# Altium PCB MainBoard.PcbDoc
Units mil, origin at the board's own origin, x right, y up, seen from the top; angles counter-clockwise.
Board outline 985 x 985 mil, 2 copper layers (Top1, Bottom4), stack 42.17 mil thick; 32 components, 51 nets, 209 pads, 95 vias.
Unrouted connection lines stored in the file: 2.
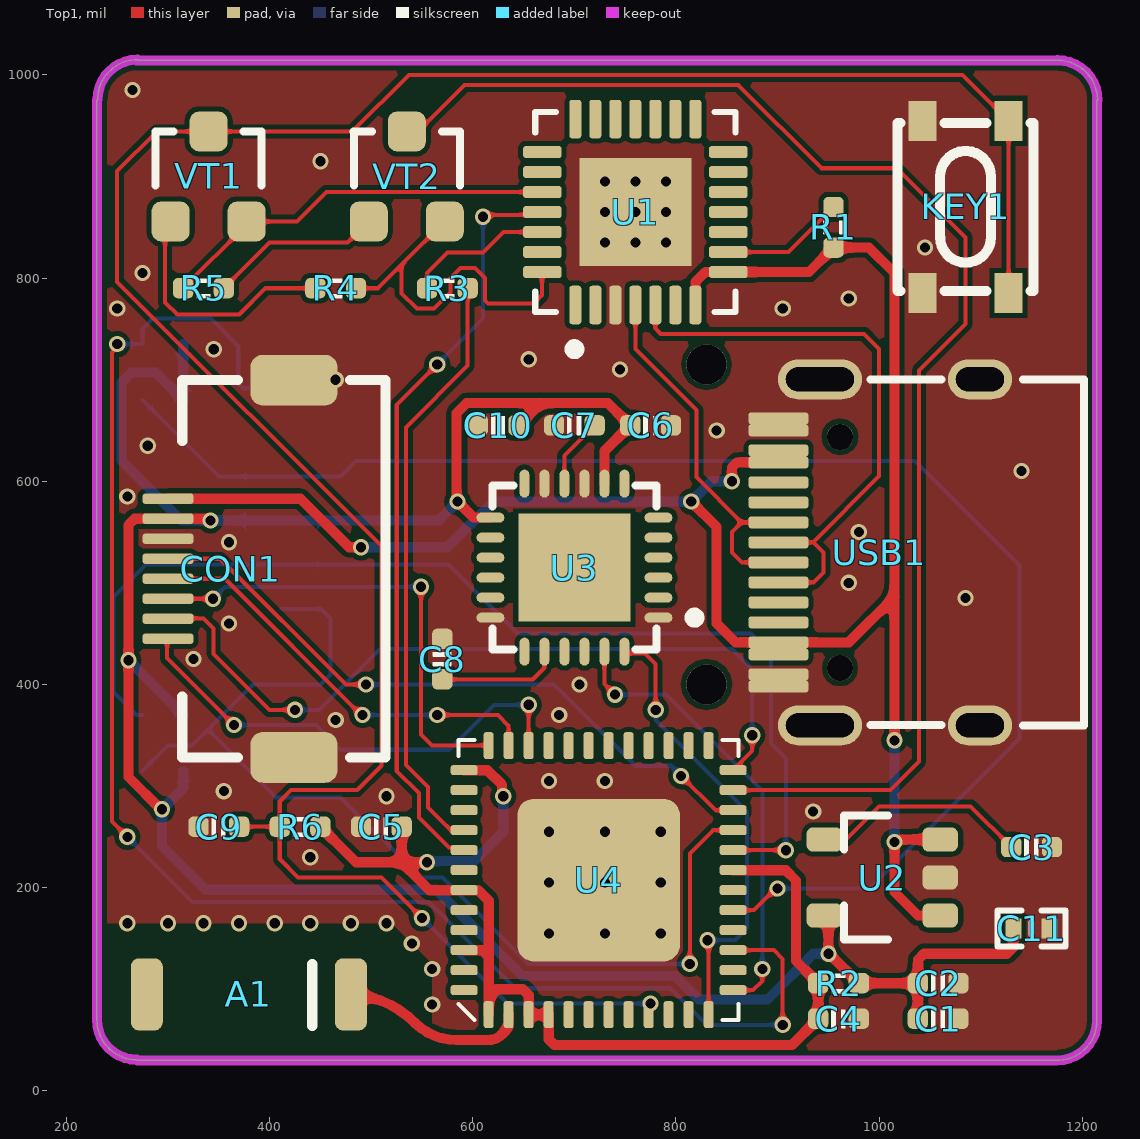
[diagram p0: Top1 view]
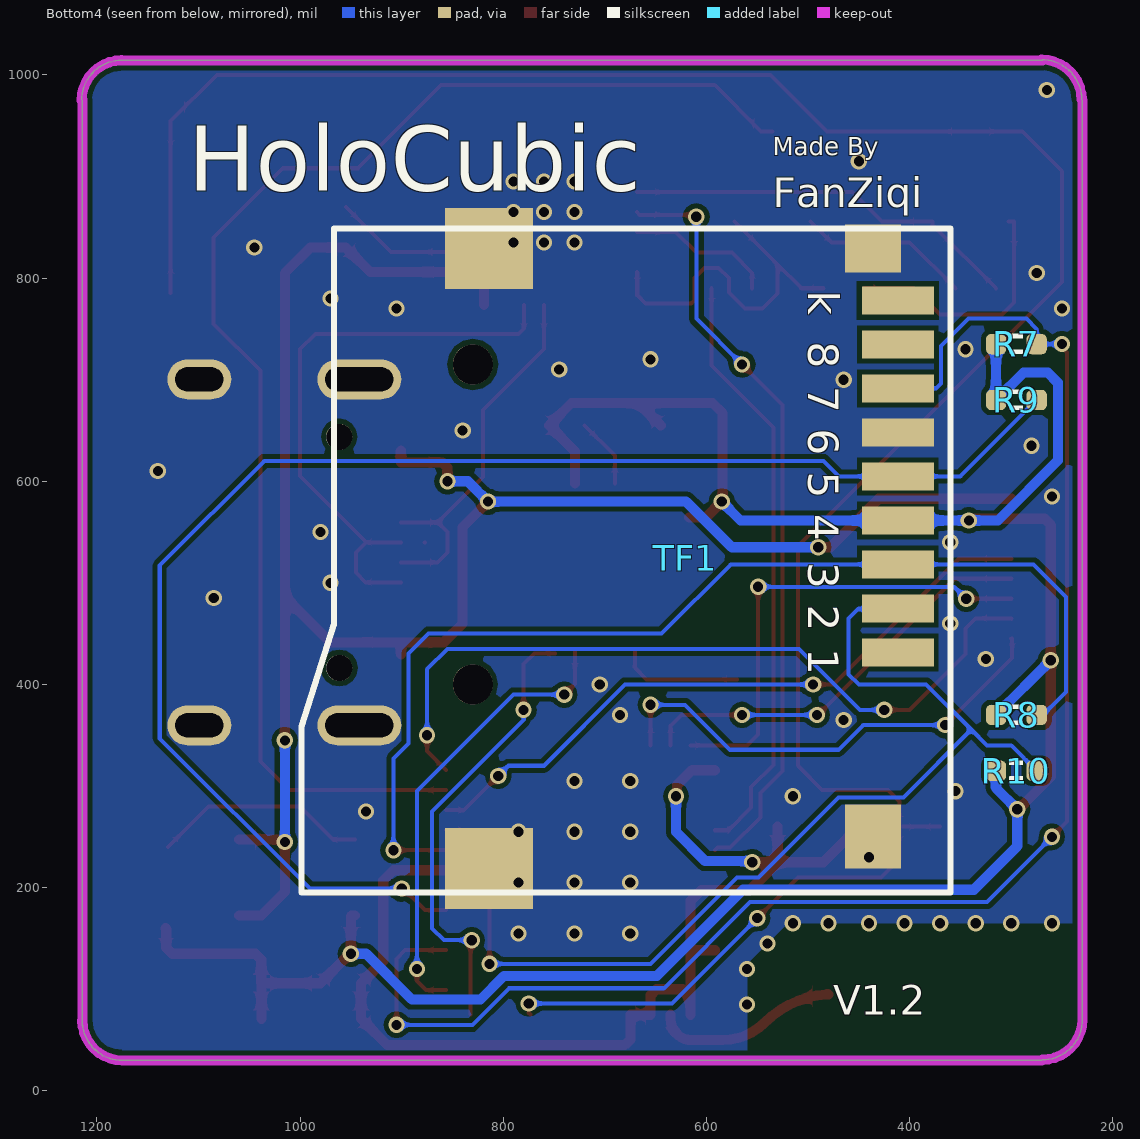
[diagram p1: Bottom4 view, seen from below]
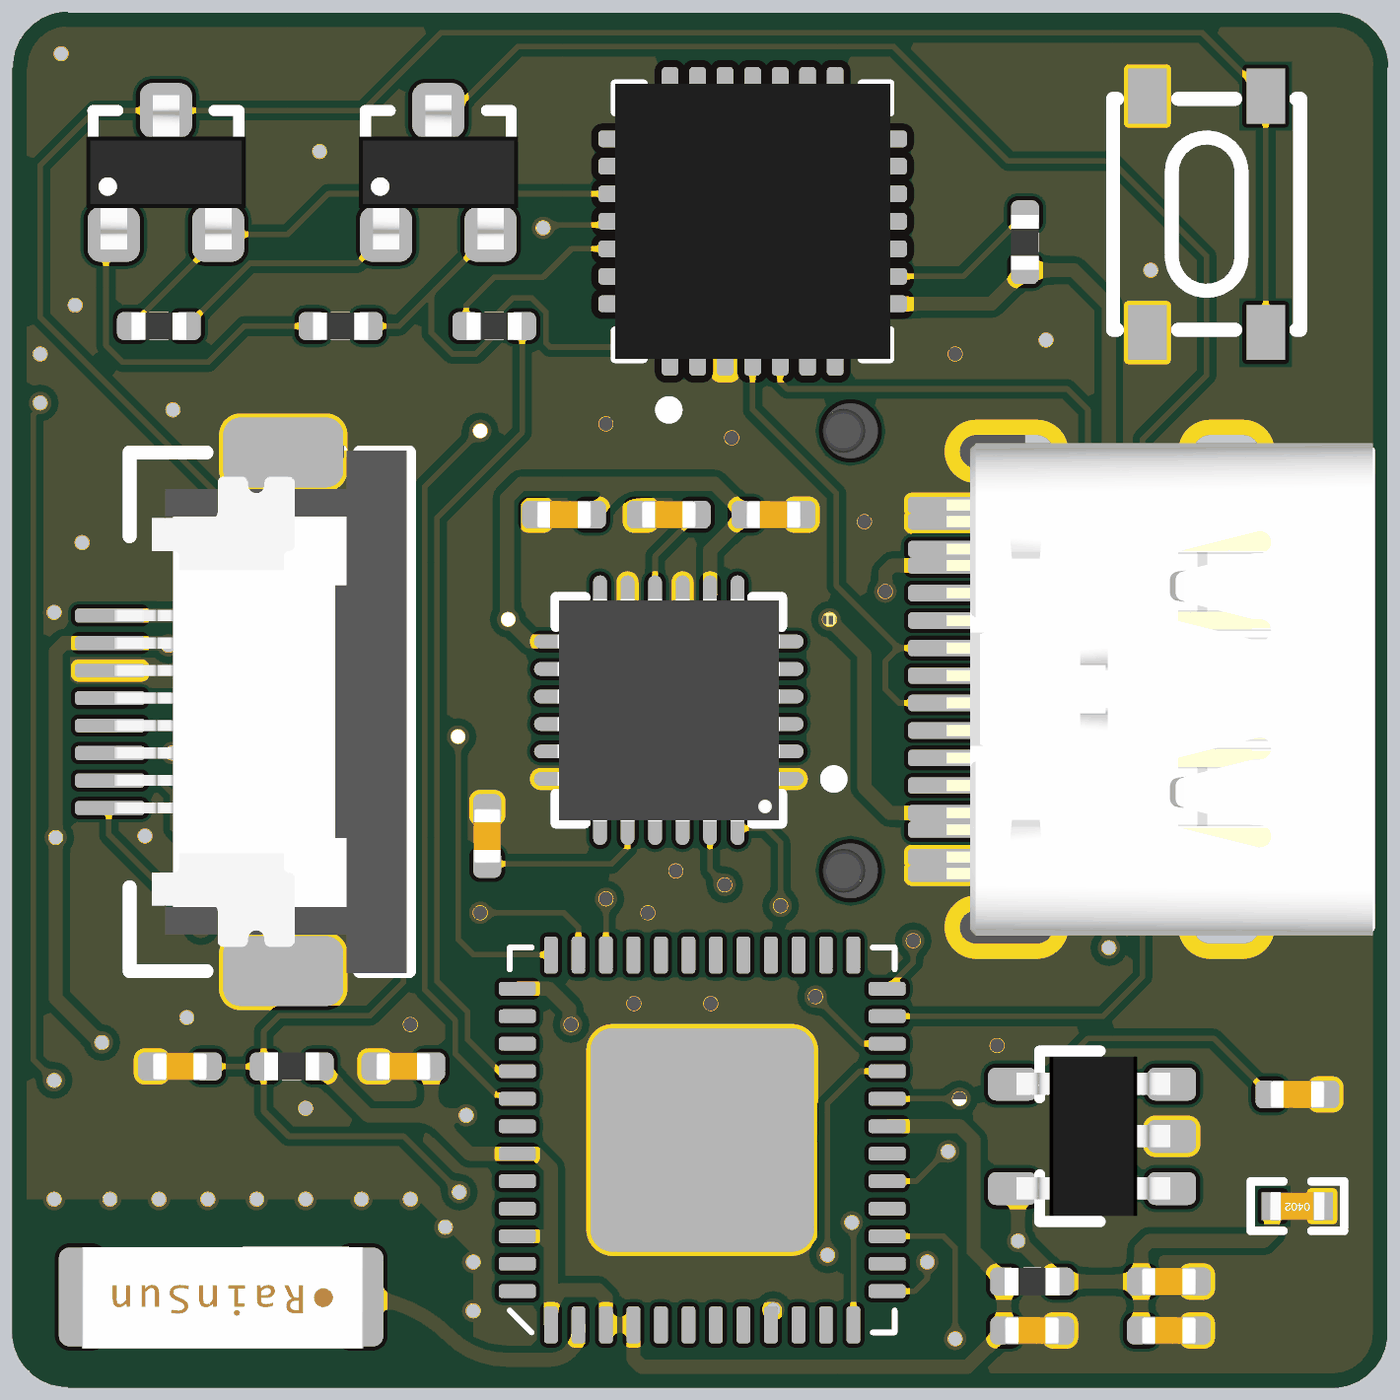
[diagram p2: 3D render of the assembled board from above, using the file's embedded part models]
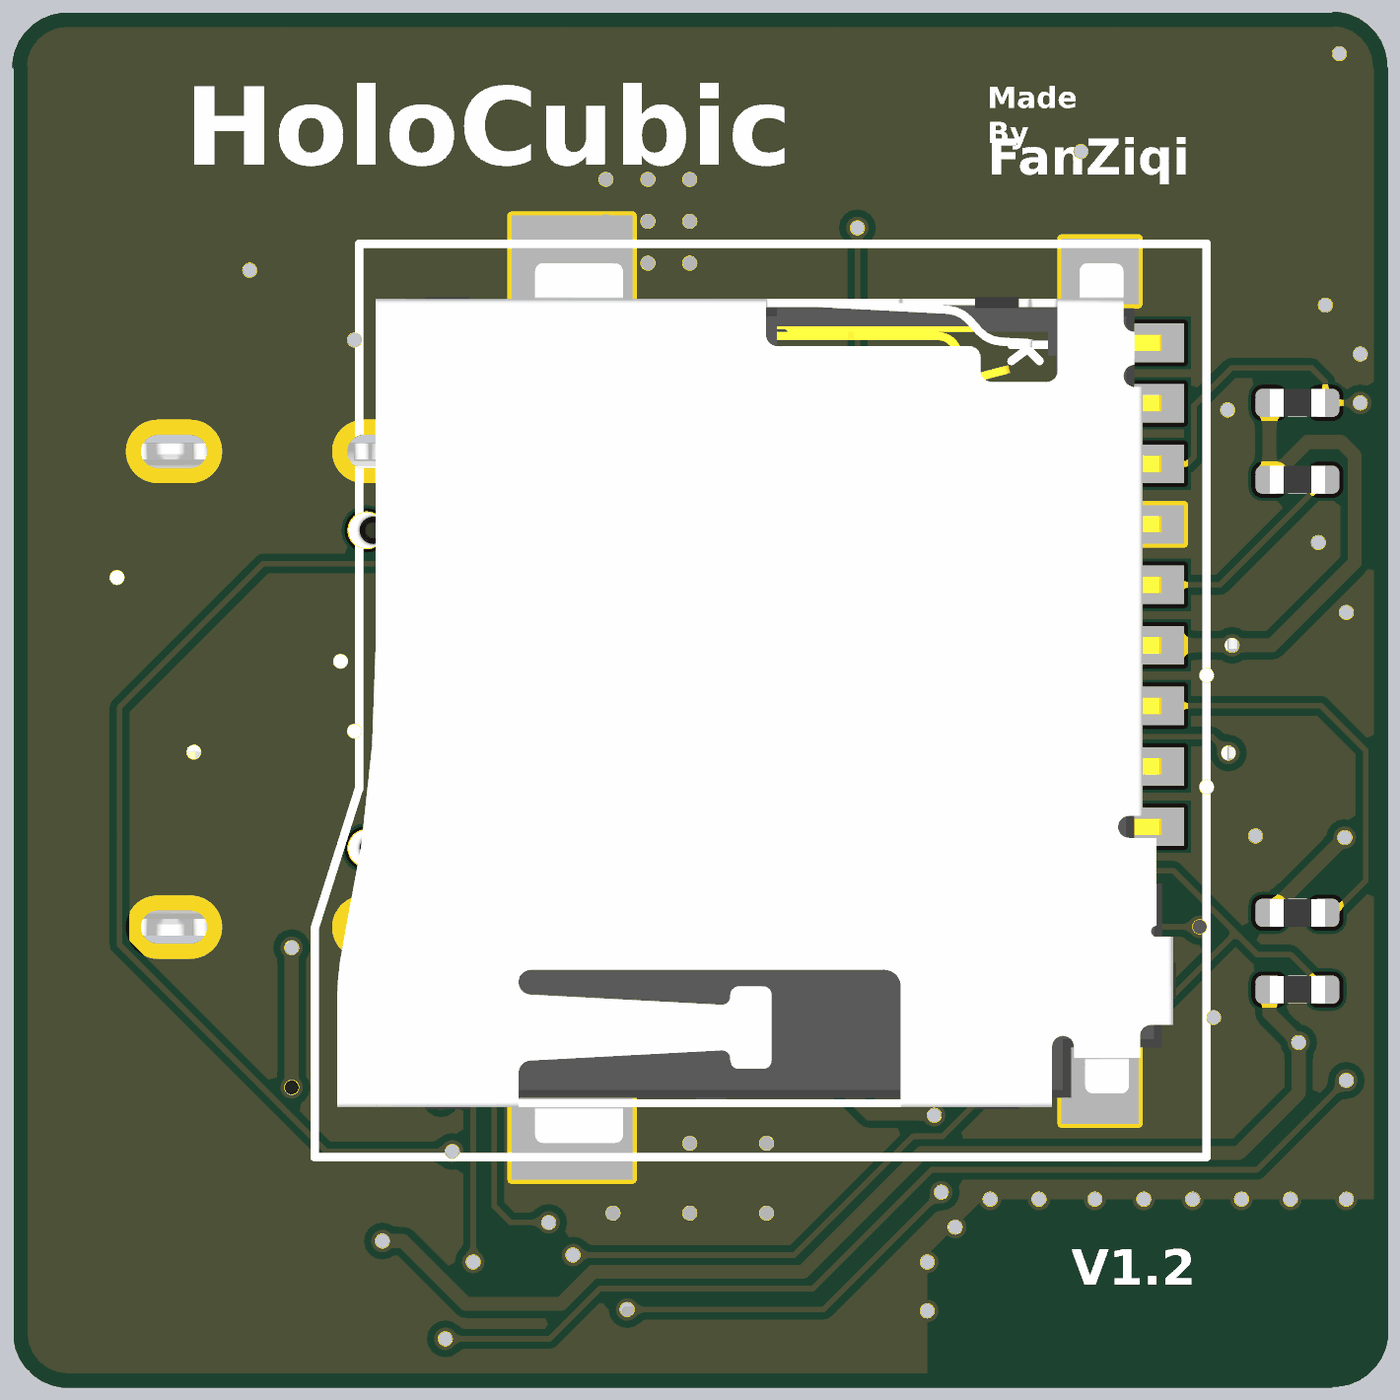
[diagram p3: 3D render of the assembled board from below, using the file's embedded part models]

## Layer stack, top to bottom
Top Solder: solder mask 0.4, Solder Resist, Dk 3.5
Top1: signal copper 1.4
Dielectric 2: core 39.37, PP-006, Dk 4.2
Bottom4: signal copper 1.4
Bottom Solder: solder mask 0.4, Solder Resist, Dk 3.5

## Board outline
230,70 230,975 230.63,975.63 cw(c270,975.63) 270,1015 269.25,1014.25 1175.75,1014.25 1175.63,1014.37 cw(c1175.63,975) 1215,975 1214.25,975.75 1214.25,70 1214.37,69.37 cw(c1175,69.37) 1175,30 270,30 269.37,30.63 cw(c269.37,70)

## Design rules (kind name [scope] priority, off if disabled: settings)
Clearance [All] p1: gap=5 ignorepadtopadclearanceinfootprint=FALSE except(1: Arc-Text Track-Text SMDPad-Text THPad-Text Via-Text Fill-Text Poly-Text Region-Text Text-Text)
ComponentClearance [All] p1: gap=0 collisioncheckmode=3 verticalgap=0 showdistances=FALSE
DiffPairsRouting [InDifferentialPairClass('USB')] p1: maxlimit=7 minlimit=5 mostfreqgap=6 toplayer_minwidth=4 toplayer_maxwidth=9 toplayer_prefwidth=4 bottomlayer_minwidth=4 bottomlayer_maxwidth=9 bottomlayer_prefwidth=4 maxuncoupledlength=500
FanoutControl Fanout_BGA [All] p1: bgadir=Out bgaviamode=Centered fanoutstyle=Auto fanoutdirection=Alternating viagrid=1 // Fanout_BGA (Default Rule)
HoleSize [All] p1: absolutevalues=TRUE maxlimit=235 minlimit=8 maxpercent=80.000 minpercent=20.000
MatchedLengths DiffPair_MatchedLengths [InDifferentialPair ('USB')] p1: tolerance=1000 checknetsindiffpair=FALSE checkdiffpairvsdiffpair=TRUE checkxsignals=TRUE checkothers=TRUE
MinimumSolderMaskSliver [All] p1 off: minsoldermaskwidth=2
PlaneClearance [All] p1: clearance=8
PlaneConnect [All] p1: planeconnectstyle=Direct reliefexpansion=20 reliefentries=4 reliefconductorwidth=10 reliefairgap=10
PolygonConnect [All] p1: connectstyle=Direct reliefconductorwidth=10 reliefentries=4 polygonreliefangle="90 Angle" airgapwidth=10
RoutingVias [All] p1: holewidth=8 width=16 viastyle="Through Hole" minholewidth=6 minwidth=12 maxholewidth=28 maxwidth=50
SilkToBoardRegionClearance [All] p1 off:
SilkToSilkClearance [All] p1: silktosilkclearance=0
SilkToSolderMaskClearance [IsPad] p1: minsilkscreentomaskgap=0 clearancetoexposedcopper=TRUE
SolderMaskExpansion [All] p1: expansion=3 istentingtop=FALSE
Width 5V [InNet('VDD_5V')] p1: maxlimit=10 minlimit=10 preferedwidth=10
Width 3V3A [InNet('3V3A')] p2: maxlimit=10 minlimit=10 preferedwidth=10
Width 3V3 [InNet('3V3')] p3: maxlimit=10 minlimit=10 preferedwidth=10
Width [InNetClass('BuXian')] p4: maxlimit=4 minlimit=4 preferedwidth=4
Width GND [InNet('GND')] p5: maxlimit=0.04 minlimit=0.04 preferedwidth=0.04
20 further rules are at their usual default settings.

## Classes and differential pairs
differential pair class 90OM: USB
net class GND: GND
differential pair USB: +USB-PWR-DP -USB-PWR-DM

## Components (designator, comment, footprint, x,y, rotation, side; value= is the part's Value field where it differs from the comment)
A1 "RAINSUN" ANT-Rainsun-AN5120 380,95 r180 top
C1 "0.1uF" CAP_0402 1058,71 r180 top value=0.1u
C2 "10uF" CAP_0402 1058,106 r180 top value=0.1u
C3 "10nF" CAP_0402 1150,240 r180 top value=0.1u
C4 "10uF" CAP_0402 960,71 r180 top value=0.1u
C5 "0.1uF" CAP_0402 510,260 r0 top value=0.1u
C6 "0.01uF" CAP_0402 775,655 r0 top value=0.1u
C7 "0.1uF" CAP_0402 700,655 r180 top value=0.1u
C8 "2.2nF" CAP_0402 570,425 r270 top value=0.1u
C9 "0.1uF" CAP_0402 350,260 r180 top value=0.1u
C10 "0.1uF" CAP_0402 625,655 r0 top value=0.1u
C11 "0.1uf" C0402_L 1150,160 r180 top
CON1 "FFC_0.5_8" FFC_0.5_8 389,513.9 r90 top
KEY1 "4x4x1.5" SW-SMD_4P-L4.2-W3.3-P2.15-LS5.1 1085,870 r270 top
R1 "10K" RES_0402 955,850 r90 top value=22R
R2 "0R" RES_0402 960,106 r180 top value=22R
R3 "200R" RES_0402 575,790 r180 top value=22R
R4 "12K" RES_0402 465,790 r180 top value=22R
R5 "12K" RES_0402 335,790 r0 top value=22R
R6 "10K" RES_0402 430,260 r180 top value=22R
R7 "10K" RES_0402 295,735 r180 bottom value=22R
R8 "10K" RES_0402 295,370 r180 bottom value=22R
R9 "10K" RES_0402 295,680 r180 bottom value=22R
R10 "10K" RES_0402 295,315 r180 bottom value=22R
TF1 "TF_Card" "Micro SD" 830,557.52 r270 bottom
U1 "CP2102" QFN-28 760,865 r90 top value=Value
U2 "LP2992 3V3" SOT23-5 1000.95,210 r180 top
U3 "MPU6050" QFN-24 700,515 r180 top
U4 "ESP32_SIP" QFN-48_7X7 723.9,207.39 r90 top
USB1 "Type-C" Type-C-TOP 1000,530 r0 top
VT1 "S8050" SMT_TRIODE_NPN 340,900 r0 top
VT2 "S8050" SMT_TRIODE_NPN 535,900 r0 top

## Footprints (in the part's own frame and the unit in brackets; to place one, negate y for a bottom-side part, rotate by r counter-clockwise, add the part's x,y. Pads: shape width x height; smd on the part's side, far side on the other; paste and mask are expansions set on the pad)
ANT-Rainsun-AN5120 [mm] "选择焊盘"
  rrect50% 0.8x1.8 smd: 1(-2.54,0) ""(2.563,0)
  silkscreen extent -1.57,-0.76 -1.57,0.79, body extent -2.57,-0.91 2.54,0.94, height 1.32
C0402_L [mm] "无极性贴片电容"
  rect 0.4x0.5 smd: 1(-0.45,0) 2(0.45,0)
  silkscreen extent -0.85,-0.45 0.85,0.45, body extent -0.5,-0.26 0.5,0.26, height 0.54
CAP_0402 [mil]
  rrect50% 20x20 smd: 1(-20,0) 2(20,0)
  silkscreen extent -7,-9 7,9, body extent -20,-10 20,10, height 20
FFC_0.5_8 [mil]
  rrect50% 50x86 smd: 0(-185.63,-35) 0(185.63,-35)
  rrect50% 10x50 smd: 1(-68.9,89) 2(-49.21,89) 3(-29.53,89) 4(-9.84,89) 5(9.84,89) 6(29.53,89) 7(49.21,89) 8(68.9,89)
  silkscreen extent -186,-125 186,75, body extent -187,-124 187,87, height 82
"Micro SD" [mm] "淘宝ID:黄晶宝石"
  round 1 hole 1 unplated: 0(-4,0) 0(4,0)
  rect 0.7x1.8 smd: 1(3.2,10.627) 2(2.1,10.627) 3(1,10.627) 4(-0.1,10.627) 5(-1.2,10.627) 6(-2.3,10.627) 7(-3.4,10.627) 8(-4.5,10.627) 9(-5.6,10.627)
  rect 2.032x2.2 smd: 10(-6.9,0.4) 10(8.6,0.4)
  rect 1.2x1.4 smd: 10(-6.9,10)
  rect 1.6x1.4 smd: 10(7.8,10)
  silkscreen extent -7.4,-4.28 9.2,11.94, body extent -7.05,-3.87 8.95,11.38, height 2
QFN-24 [mm] "QFN, 24-Leads, Body 4.1x4.1mm (max), Pitch 0.50mm, IPC Low Density"
  oval 0.7x0.25 smd: 1(-2.1,1.25) 2(-2.1,0.75) 3(-2.1,0.25) 4(-2.1,-0.25) 5(-2.1,-0.75) 6(-2.1,-1.25) 13(2.1,-1.25) 14(2.1,-0.75) 15(2.1,-0.25) 16(2.1,0.25) 17(2.1,0.75) 18(2.1,1.25)
  oval 0.25x0.7 smd: 7(-1.25,-2.1) 8(-0.75,-2.1) 9(-0.25,-2.1) 10(0.25,-2.1) 11(0.75,-2.1) 12(1.25,-2.1) 19(1.25,2.1) 20(0.75,2.1) 21(0.25,2.1) 22(-0.25,2.1) 23(-0.75,2.1) 24(-1.25,2.1)
  rect 2.8x2.7 smd: ""(0,0)
  silkscreen extent -3.13,-2.05 2.05,2.05, body extent -2.02,-2.02 2.02,2.02, height 0.95
QFN-28 [mil]
  rrect50% 38x12 smd mask+5: 1(-91.5,59.05) 2(-91.5,39.37) 3(-91.5,19.68) 4(-91.5,0) 5(-91.5,-19.69) 6(-91.5,-39.37) 7(-91.5,-59.06) 15(91.5,-59.06) 16(91.5,-39.37) 17(91.5,-19.69) 18(91.5,0) 19(91.5,19.68) 20(91.5,39.37) 21(91.5,59.05)
  rrect50% 12x38 smd mask+5: 8(-59.06,-91.5) 9(-39.37,-91.5) 10(-19.69,-91.5) 11(0,-91.5) 12(19.68,-91.5) 13(39.37,-91.5) 14(59.05,-91.5) 22(59.05,91.5) 23(39.37,91.5) 24(19.68,91.5) 25(0,91.5) 26(-19.69,91.5) 27(-39.37,91.5) 28(-59.06,91.5)
  rect 106.3x110.24 smd: 29(0,0)
  silkscreen extent -140,-99 98,98, body extent -98,-98 98,98, height 35
QFN-48_7X7 [mm]
  rrect20% 4.064x4.064 smd: 0(0,0)
  rrect50% 0.675x0.25 smd: 1(-3.363,2.75) 2(-3.363,2.25) 3(-3.363,1.75) 4(-3.363,1.25) 5(-3.363,0.75) 6(-3.363,0.25) 7(-3.363,-0.25) 8(-3.363,-0.75) 9(-3.363,-1.25) 10(-3.363,-1.75) 11(-3.363,-2.25) 12(-3.363,-2.75) 25(3.362,-2.75) 26(3.362,-2.25) 27(3.362,-1.75) 28(3.362,-1.25) 29(3.362,-0.75) 30(3.362,-0.25) 31(3.362,0.25) 32(3.362,0.75) 33(3.362,1.25) 34(3.362,1.75) 35(3.362,2.25) 36(3.362,2.75)
  rrect50% 0.25x0.675 smd: 13(-2.75,-3.363) 14(-2.25,-3.363) 15(-1.75,-3.363) 16(-1.25,-3.363) 17(-0.75,-3.363) 18(-0.25,-3.363) 19(0.25,-3.363) 20(0.75,-3.363) 21(1.25,-3.363) 22(1.75,-3.363) 23(2.25,-3.363) 24(2.75,-3.363) 37(2.75,3.362) 38(2.25,3.362) 39(1.75,3.362) 40(1.25,3.362) 41(0.75,3.362) 42(0.25,3.362) 43(-0.25,3.362) 44(-0.75,3.362) 45(-1.25,3.362) 46(-1.75,3.362) 47(-2.25,3.362) 48(-2.75,3.362)
  silkscreen extent -3.5,-3.5 3.5,3.5, body extent -3.5,-3.5 3.5,3.5, height 1
RES_0402 [mil]
  rrect50% 20x20 smd: 1(-20,0) 2(20,0)
  silkscreen extent -7,-10 7,10, body extent -20,-10 20,10, height 14
SMT_TRIODE_NPN [mm] "Surface mount NPN transistor, package SOT-23"
  rrect50% 0.95x1 smd: 1(-0.95,-1.125) 2(0.95,-1.125) 3(0,1.125)
  silkscreen extent -1.33,-0.23 1.32,1.12, body extent -1.45,-1.4 1.45,1.4, height 1.3
SOT23-5 [mm] "SOT23, 3-Leads, Body 3.1x3.0mm (max), Pitch 0.95mm, IPC Medium Density"
  rrect50% 0.889x0.6 smd: 1(-1.5,0.95) 2(-1.5,0) 3(-1.5,-0.95) 4(1.396,-0.95) 5(1.396,0.95)
  silkscreen extent -0.2,-1.55 0.9,1.55, body extent -1.48,-1.45 1.32,1.45, height 1.2
SW-SMD_4P-L4.2-W3.3-P2.15-LS5.1 [mm]
  rect 1x0.7 smd: 1(-2.15,1.075) 2(2.15,1.075) 3(-2.15,-1.075) 4(2.15,-1.075)
  silkscreen extent -2.1,-1.7 2.1,1.7
Type-C-TOP [mm]
  round 0.65 hole 0.65: 0(-0.98,-2.89) 0(-0.98,2.89)
  oval 1.6x1 hole 0.6 slot 1.2 at 0 deg: 1(2.52,4.325) 2(2.52,-4.325)
  oval 2.1x1 hole 0.6 slot 1.7 at 0 deg: 3(-1.48,-4.325) 4(-1.48,4.325)
  rrect50% 1.5x0.3 smd: A1(-2.52,-3.35) A4(-2.52,-2.55) A5(-2.52,-1.25) A6(-2.52,-0.25) A7(-2.52,0.25) A8(-2.52,1.25) A9(-2.52,2.55) A12(-2.52,3.35) B1(-2.52,3.05) B4(-2.52,2.25) B5(-2.52,1.75) B6(-2.52,0.75) B7(-2.52,-0.75) B8(-2.52,-1.75) B9(-2.52,-2.25) B12(-2.52,-3.05)
  silkscreen extent -0.22,-4.32 5.12,4.32, body extent -2.57,-4.48 5.18,4.48, height 3.26

## Part data
A1: library part ANT-Rainsun-AP5120
C1 C2 C3 C4 C5 C6 C7 C8 C9 C10: library part 电容-0402, "Capacitor"
C11: library part C, "贴片电容", BOM名称=无极性贴片电容, 封装库来自淘宝卖家ID：黄晶宝石=其他店铺购入均为盗版假冒封装库，请立即申请退款, 联系卖家，免费查找封装=唯一出售店铺网址https://shop463601444.taobao.com
CON1: "FFC", System=Connector
KEY1: library part "TSW SMD-4x4", "贴片4x4轻触开关", BOM名称=贴片4x4轻触开关, 联系卖家，免费查找封装=唯一出售店铺网址https://shop463601444.taobao.com
R1 R2 R3 R4 R5 R6 R7 R8 R9 R10: library part 电阻-0402, "Resistor"
TF1: "TF卡座", BOM名称=TF卡座, 联系卖家，免费技术支持=唯一出售店铺网址https://shop463601444.taobao.com
U1: "USB转TTL", MFG #1="SILICON LABS", PART DESC="SINGLE-CHIP USB TO UART BRIDGE, QFN28, RoHS.", PART NUMBER=CP2102, RefDes=RefDes, Type=DEV
U2: library part LP2992, "LDO"
U3: "六轴传感器"
U4: library part ESP32-PICO
USB1: library part USB-Type-C-TOP
VT1 VT2: library part SMT_TRIODE_NPN, "Surface mount NPN transistor, package SOT-23"

## Via types
v1: diameter 16, hole 10, Top1 to Bottom4, tented both sides, 95 vias

## Nets (pads, with @x,y where several pads share a name; then routed paths per layer and width w, separated by ;. In a path a pad name is that pad's centre, name@x,y a point inside that pad or via, vN(x,y) a via of type N, cw(c..) or ccw(c..) an arc to the next point about the centre after c; other vN are vias at no path point)
3V3: C1.2 C2.2 C6.1 C10.2 C11.2 CON1.7 R2.1 R7.1 R8.1 R9.1 R10.1 TF1.4 U2.5 U3.8 U3.13 | length 2571.5
  Top1 w10: v1(294.13,277.12) 292.88,277.12 261.13,308.87 v1(261.13,423.87) 261.13,557.12 267.12,563.11 CON1.7 340.12,563.11 v1(341.77,561.46) ; v1@584.13,580 584.13,667.12 594.13,677.12 667.12,677.12 ; v1(585,580) 600.79,564.21 U3.13 ; C10.2 667.12,677.12 ; U3.8 729.53,629.53 C6.1 732.88,677.12 667.12,677.12 ; U2.5 949.13,172.6 950,171.73 v1(950,135) 951,135 R2.1 C2.2 ; C1.2 C2.2 ; C11.2 1131.68,159.4 1131.68,140.86 1125.82,135 1044,135 1038.14,129.14 1038.14,106.14 C2.2
  Bottom4 w10: v1(261.13,423.87) R8.1 ; R10.1 315,297.99 v1(294.13,277.12) 294.13,240.87 337,198 563.97,198 648.97,113 799.41,113 822.41,90 890,90 935,135 v1(950,135) ; R7.1 R9.1 287.88,707.12 264.13,707.12 254.13,697.12 254.13,620.46 313.13,561.46 v1(341.77,561.46) TF1.4 566.46,561.46 v1(585,580)
3V3A: C4.2 C5.2 R2.2 R6.1 U4.1 U4.3 U4.4 U4.19 U4.37 U4.43 U4.46 | length 1169.8
  Top1 w10: R6.1 455,255 485,225 530,225 ; C5.2 530,225 ; v1(555,225) 530,225 ; U4.46 609.26,138.49 615.63,132.12 ; U4.37 614.35,315.65 628.85,301.15 628.85,291.15 v1(630,290) ; U4.1 615.63,92.12 ; U4.19 908.02,217.23 918.13,207.12 918.13,127.87 R2.2 C4.2 914,45 680.54,45 674.68,50.86 U4.4 U4.3 655,94.14 649.14,100 623.51,100 615.63,92.12 ; 530,225 557.46,197.54 U4.43 605.21,197.54 615.63,187.12 615.63,132.12 ; 615.63,92.12 615.63,132.12
  Bottom4 w10: v1(555,225) 556.15,226.15 601.15,226.15 630,255 v1(630,290)
BH_SCL: U3.23 U4.13 | length 450.3
  Top1 w4: U3.23 729.53,400.47 v1(740,390) ; U4.13 875.88,99.12 885,108.24 v1(885,120)
  Bottom4 w4: v1(740,390) 790,390 885,295 v1(885,120)
BH_SDA: U3.24 U4.12 | length 450.1
  Top1 w4: U3.24@749.21,430.54 769.46,430.54 780,420 v1(780,375) ; v1(830.97,148.33) 832.16,147.13 U4.12
  Bottom4 w4: v1(780,375) 780,365 870,275 870,160 858.33,148.33 v1(830.97,148.33)
CP_Rx: U1.25 U4.41 | length 753.7
  Top1 w4: v1(565,715) 525.13,675.13 525.13,314.87 547,293 547,269.1 576.73,239.37 589.06,239.37 U4.41 ; v1(610,860.32) 611.98,862.3 665.8,862.3 U1.25
  Bottom4 w4: v1(565,715) 610,760 v1(610,860.32)
CP_Tx: R3.1 U4.40 | length 590.2
  Top1 w4: U4.40 591.42,256.5 578.5,256.5 556,279 556,299 534.13,320.87 534.13,653.12 595,713.99 R3.1
DC: CON1.5 U4.22 | length 658.8
  Top1 w4: CON1.5 351.26,523.74 475,400 v1(495,400) ; v1(805,310) 838.72,276.28 U4.22
  Bottom4 w4: v1(495,400) 680,400 760,320 795,320 v1(805,310)
DTR: R4.1 U1.28 VT2.2 | length 365.7
  Top1 w4: R4.1 506.69,790 530,813.31 ; VT2.2 530,813.31 ; U1.28 668.13,805.57 668.13,783.13 660,775 615,775 612,778 612,799.97 601.97,810 588.03,810 578,799.97 578,786.03 561.97,770 545,770 530,785 530,813.31
EN: C9.1 KEY1.1 KEY1.2 R6.2 U4.9 VT1.3 | length 2444.6
  Top1 w4: C9.1 R6.2 ; v1(550,170) 510,210 428.03,210 410,228.03 R6.2 ; U4.9 775,76.89 774.87,77.01 v1(774.87,86) ; KEY1.2 KEY1.1 1081.97,1000 537.01,1000 481.3,944.29 VT1.3 289.13,944.29 250,905.16 250,796.21 510,536.21 510,320 486.27,296.27 421.27,296.27 410,285 R6.2
  Bottom4 w4: v1(550,170) 634,86 v1(774.87,86)
FLASH_CLK: U4.31
FLASH_CS: U4.25
FLASH_SD0: U4.27
FLASH_SD1: U4.33
FLASH_SD2: U4.30
FLASH_SD3: U4.32
GND: C1.1 C2.1 C3.1 C4.1 C5.1 C6.2 C7.2 C8.1 C9.2 C10.1 C11.1 CON1.0 CON1.6 KEY1.3 KEY1.4 TF1.6 TF1.10 U1.3 U1.29 U2.2 U3.1 U3.9 U3.11 U3.18 U4.0 USB1.1 USB1.2 USB1.3 USB1.4 USB1.A1 USB1.A12 USB1.B1 USB1.B12
  other v1: 560,85 560,120 540,145 675,155 730,155 785,155 260,165 300,165 335,165 370,165 405,165 440,165 480,165 515,165 675,205 730,205 785,205 440,230 675,255 730,255 785,255 935,275 515,290 355,295 675,305 730,305 465,365 685,370 705,400 325,425 360,460 1085,485 970,500 360,540 980,550 260,585 1140,610 280,635 840,650 465,700 745,710 655,720 345,730 250,770 905,770 970,780 275,805 1045,830 730,835 760,835 790,835 730,865 760,865 790,865 730,895 760,895 790,895 450,915 265,985
GPIO0: U4.23 VT2.3 | length 1360.4
  Top1 w4: VT2.3 546.13,944.29 591.84,990 861.25,990 943.13,908.12 1016.88,908.12 1085,840 1085,755 1039.13,709.13 1039.13,324.13 1010.97,295.97 U4.23
GPIO4: CON1.2 U4.24 | length 767.3
  Top1 w4: CON1.2 300.32,465 335,465 345,455 345,430 400,375 v1(425,375) ; U4.24 875,334.37 v1(875,350)
  Bottom4 w4: v1(425,375) 448.79,375 508.79,435 855,435 875,415 v1(875,350)
GPIO5: CON1.1 U4.34 | length 471.8
  Top1 w4: CON1.1 299.13,445 299.13,425.87 v1(365,360) ; U4.34 v1(655,380)
  Bottom4 w4: v1(365,360) 445.68,360 469.95,335.73 576.73,335.73 621.01,380 v1(655,380)
GPIO9: U4.28
GPIO10: U4.29
GPIO12: U4.18
GPIO13: R8.2 TF1.3 U4.20 | length 1080
  Top1 w4: U4.20 v1(908.13,236.91)
  Bottom4 w4: R8.2 268.79,370 246.13,392.66 246.13,486.13 278.15,518.15 576.1,518.15 644.25,450 845.86,450 873.7,450 893.39,430.31 893.39,341.77 908.13,327.04 v1(908.13,236.91)
GPIO14: R9.2 TF1.5 U4.17 | length 1465.3
  Top1 w4: U4.17 876.86,177.86 898.13,199.12 v1(900,199.12)
  Bottom4 w4: R9.2 350.24,604.76 TF1.5 469.76,604.76 485,620 1035.25,620 1138.13,517.12 1138.13,346.91 990.33,199.12 v1(900,199.12)
GPIO15: R10.2 TF1.2 U4.21 | length 1062.3
  Top1 w4: v1(813.6,125) 813.6,233.51 836.69,256.6 U4.21
  Bottom4 w4: R10.2 300,340 323.79,340 339.39,355.61 ; TF1.2 412.16,474.29 450.71,474.29 460,465 460,410 450,400 383.79,400 339.39,355.61 ; v1(813.6,125) 655,125 570,210 548.79,210 469.86,288.93 406.07,288.93 339.39,355.61
GPIO18: CON1.4 U4.35 | length 414.8
  Top1 w4: CON1.4 355.95,504.05 490,370 v1(491.34,370) ; v1(565,370) 624.67,370 635.31,359.36 U4.35
  Bottom4 w4: v1(491.34,370) v1(565,370)
GPIO19: U4.38
GPIO21: U4.42
GPIO22: U4.39
GPIO23: CON1.3 U4.36 | length 470.3
  Top1 w4: CON1.3@300,484.37 v1@344.37,484.37 ; v1(549.13,496.12) 549.13,350.87 560,340 615.39,340 U4.36
  Bottom4 w4: v1(344.39,484.39) 356.12,496.12 v1(549.13,496.12)
GPIO25: U4.14
GPIO26: R7.2 TF1.7 U4.15 | length 1562.9
  Top1 w4: v1(250,735) 250,731.75 245,726.75 245,265 v1(260,250) ; U4.15 896.52,138.49 905,130 v1(905,65)
  Bottom4 w4: v1(250,735) R7.2 275,750 285,760 342.25,760 369.13,733.12 369.13,696.38 374.13,691.38 TF1.7 ; v1(260,250) 324,186 557.03,186 642.03,101 794.44,101 830.44,65 v1(905,65)
GPIO27: U4.16
GPIO34: U4.10
GPIO35: U4.11
GPIO37: U4.6
GPIO38: U4.7
NetA1_1: A1.1 U4.2 | length 183.6
  Top1 w10: A1.1 A1.1 480.58,95.04 cw(c480.95,85.04) 481.71,95.02 cw(c474.75,-1.25) 542.87,67.13 542.94,67.06 543.07,66.93 ccw(c584.14,108.29) 584.14,50 ; 584.21,50 615,50 ccw(c615,70.31) 635.31,70.31 U4.2
NetC3_2: C3.2 U2.4 | length 214.1
  Top1 w4: U2.4 967.4,247.4 1000,280 1090,280 C3.2
NetC7_1: C7.1 U3.10 | length 69.7
  Top1 w4: U3.10 690.16,625.16 C7.1
NetC8_2: C8.2 U3.20 | length 121.1
  Top1 w4: C8.2 659.01,405 670.47,416.47 U3.20
NetR1_2: R1.2 U1.9 | length 121.9
  Top1 w4: U1.9 910.63,825.63 R1.2
NetR3_2: R3.2 U1.26 | length 145.2
  Top1 w4: R3.2 555,805 575,825 610,825 630.32,845.32 U1.26
NetR4_2: R4.2 VT1.1 | length 248.6
  Top1 w4: VT1.1 297.13,855.71 297.13,776.12 309.13,764.12 370.13,764.12 396.01,790 R4.2
NetR5_2: R5.2 VT2.1 | length 169.8
  Top1 w4: R5.2 400,835 476.89,835 VT2.1
RTS: R5.1 U1.24 VT1.2 | length 394.7
  Top1 w4: R5.1 377.4,852.4 VT1.2 427.13,855.71 456.1,884.69 U1.24
SENSOR_VN: U4.8
SENSOR_VP: U4.5
USB-PWR-DM: U1.5 USB1.A7 USB1.B7 | length 585.7
  Top1 w4: U1.5 779.68,750.32 785,745 985,745 1000,730 1000,605 934.84,539.84 USB1.A7 ; USB1.A7@877.16,539.84 USB1.A7@877.68,539.84 ; USB1.B7 935.47,500.47 945,510 945,530 935.16,539.84
USB-PWR-DP: U1.4 USB1.A6 USB1.B6 | length 376.9
  Top1 w4: U1.4 760,730 820,670 820,604.05 864.53,559.53 ; USB1.A6 864.84,520.16 855,530 855,550 864.53,559.53 ; USB1.B6 864.53,559.53
VDD_5V: CON1.8 R1.1 U1.7 U1.8 U2.1 U2.3 USB1.A4 USB1.A9 USB1.B4 USB1.B9 | length 1971.2
  Top1 w10: CON1.8 430.45,582.79 478.25,535 v1(490,535) ; v1(815,580) 840,555 840,460 858.58,441.42 USB1.B9 ; U1.7 819.05,796.12 828.88,805.95 U1.8 930.95,805.95 950,825 R1.1 990,830 1015,805 1015,486.25 ; v1(855,600) 855,613.57 860.01,618.58 USB1.B4 USB1.A9 ; USB1.A4 USB1.B9 ; v1(1015,345) 1015,486.25 ; U2.1 1038.13,172.6 1015,195.73 v1(1015,245) 1017.4,247.4 U2.3 ; USB1.B9 970.16,441.42 1015,486.25
  Bottom4 w10: v1(490,535) 575,535 620,580 v1(815,580) 835,600 v1(855,600) ; v1(1015,245) v1(1015,345)
pads on no net: A1. TF1.0 TF1.1 TF1.8 TF1.9 U1.1 U1.2 U1.6 U1.10 U1.11 U1.12 U1.13 U1.14 U1.15 U1.16 U1.17 U1.18 U1.19 U1.20 U1.21 U1.22 U1.23 U1.27 U3. U3.2 U3.3 U3.4 U3.5 U3.6 U3.7 U3.12 U3.14 U3.15 U3.16 U3.17 U3.19 U3.21 U3.22 U4.26 U4.44 U4.45 U4.47 U4.48 USB1.0 USB1.A5 USB1.A8 USB1.B5 USB1.B8

## Polygon pours and split planes (outlines as drawn)
GND on Bottom4 "GND_L02_P001" (solid, remove dead copper, pour order 2): 1235,1040 1235,5 205,-5 205,1035
GND on Top1 "GND_L02_P001" (solid, remove dead copper, pour order 5): 1235,1040 1235,5 205,-5 205,1035

## Keep-outs
Keep-Out Layer:
  lines w10: 230,975 230,70 ccw(c269.37,70) 269.37,30.63 ; 230.63,975.63 cw(c270,975.63) 270,1015 ; 269.25,1014.25 1175.75,1014.25 ; 270,30 1175,30 ccw(c1175,69.37) 1214.37,69.37 ; 1175.63,1014.37 cw(c1175.63,975) 1215,975 ; 1214.25,70 1214.25,975.75

## Other copper
Top1:
  pour cut-out: 215,165 520,165 560,125 560,10 215,10
Bottom4:
  pour cut-out: 215,165 520,165 560,125 560,10 215,10

## Silkscreen, mask and mechanical layers (free items; w line width, h text height)
Bottom Overlay:
  text "Made By" at 535,915 h30
  text "HoloCubic" at 1110,865 h110
  text "FanZiqi" at 535,860 h50
  text "V1.2" at 475,65 h50
Drill Drawing:
  circle w10: c110.62,2132.28 r33.33
  lines w10: 77.29,1498.94 110.62,1515.61 143.96,1498.94 127.29,1532.28 143.96,1565.61 110.62,1548.94 77.29,1565.61 93.96,1532.28 77.29,1498.94 ; 77.29,1798.94 143.96,1798.94 143.96,1865.61 77.29,1865.61 77.29,1798.94 ; 77.29,2015.61 143.96,2015.61 110.62,1948.94 77.29,2015.61
  lines w15: 17.5,1453.94 13225.79,1453.94 ; 17.5,2203.94 13225.79,2203.94 ; 568.38,1303.94 568.38,2353.94 ; 1158.22,1303.94 1158.22,2353.94 ; 2257.9,1303.94 2257.9,2353.94 ; 2763.78,1303.94 2763.78,2353.94 ; 3497.58,1303.94 3497.58,2353.94 ; 4687.23,1303.94 4687.23,2353.94 ; 5277.08,1303.94 5277.08,2353.94 ; 6022.88,1303.94 6022.88,2353.94 ; 7212.53,1303.94 7212.53,2353.94 ; 8066.29,1303.94 8066.29,2353.94 ; 9399.9,1303.94 9399.9,2353.94 ; 10733.51,1303.94 10733.51,2353.94 ; 11823.19,1303.94 11823.19,2353.94 ; 17.5,1303.94 13225.79,1303.94 13225.79,2353.94 17.5,2353.94 17.5,1303.94
  text "Symbol" at 107.5,2248.94 h72
  text "Count" at 613.38,2248.94 h72
  text "Hole Size" at 1203.22,2248.94 h72
  text "Plated" at 2302.9,2248.94 h72
  text "Hole Type" at 2808.78,2248.94 h72
  text "Drill Layer Pair" at 3542.58,2248.94 h72
  text "Via/Pad" at 4732.23,2248.94 h72
  text "Pad Shape" at 5322.08,2248.94 h72
  text "Template" at 6067.88,2248.94 h72
  text "Description" at 7257.53,2248.94 h72
  text "Hole Tolerance (+)" at 8111.29,2248.94 h72
  text "Hole Tolerance (-)" at 9444.9,2248.94 h72
  text "Hole Length" at 10778.51,2248.94 h72
  text "Routed Path Length" at 11868.19,2248.94 h72
  text "2" at 613.38,2098.94 h60
  text "23.62mil (0.600mm)" at 1203.22,2098.94 h60
  text "PTH" at 2302.9,2098.94 h60
  text "Slot" at 2808.78,2098.94 h60
  text "Top1 - Bottom4" at 3542.58,2098.94 h60
  text "Pad" at 4732.23,2098.94 h60
  text "Rounded" at 5322.08,2098.94 h60
  text "r160_100h60_120r100" at 6067.88,2098.94 h60
  text "47.24mil (1.200mm)" at 10778.51,2098.94 h60
  text "23.62mil (0.600mm)" at 11868.19,2098.94 h60
  text "2" at 613.38,1948.94 h60
  text "23.62mil (0.600mm)" at 1203.22,1948.94 h60
  text "PTH" at 2302.9,1948.94 h60
  text "Slot" at 2808.78,1948.94 h60
  text "Top1 - Bottom4" at 3542.58,1948.94 h60
  text "Pad" at 4732.23,1948.94 h60
  text "Rounded" at 5322.08,1948.94 h60
  text "r210_100h60_170r100" at 6067.88,1948.94 h60
  text "66.93mil (1.700mm)" at 10778.51,1948.94 h60
  text "43.31mil (1.100mm)" at 11868.19,1948.94 h60
  text "2" at 613.38,1798.94 h60
  text "25.59mil (0.650mm)" at 1203.22,1798.94 h60
  text "PTH" at 2302.9,1798.94 h60
  text "Round" at 2808.78,1798.94 h60
  text "Top1 - Bottom4" at 3542.58,1798.94 h60
  text "Pad" at 4732.23,1798.94 h60
  text "Rounded" at 5322.08,1798.94 h60
  text "c65h65" at 6067.88,1798.94 h60
  text "-" at 10778.51,1798.94 h60
  text "-" at 11868.19,1798.94 h60
  text "2" at 613.38,1648.94 h60
  text "39.37mil (1.000mm)" at 1203.22,1648.94 h60
  text "NPTH" at 2302.9,1648.94 h60
  text "Round" at 2808.78,1648.94 h60
  text "Top1 - Bottom4" at 3542.58,1648.94 h60
  text "Pad" at 4732.23,1648.94 h60
  text "Rounded" at 5322.08,1648.94 h60
  text "c100hn100" at 6067.88,1648.94 h60
  text "-" at 10778.51,1648.94 h60
  text "-" at 11868.19,1648.94 h60
  text "A" at 78.41,1638.95 h66.67
  text "95" at 613.38,1498.94 h60
  text "10.00mil (0.254mm)" at 1203.22,1498.94 h60
  text "PTH" at 2302.9,1498.94 h60
  text "Round" at 2808.78,1498.94 h60
  text "Top1 - Bottom4" at 3542.58,1498.94 h60
  text "Via" at 4732.23,1498.94 h60
  text "Rounded" at 5322.08,1498.94 h60
  text "v41h25m0mx0" at 6067.88,1498.94 h60
  text "-" at 10778.51,1498.94 h60
  text "-" at 11868.19,1498.94 h60
  text "103 Total" at 613.38,1348.94 h60
  text "Slot definitions :" at 107.5,1203.97 h60
  text "Routed Path Length" at 1140.19,1203.97 h60
  text "= Calculated from tool start centre position to tool end centre position." at 2242.86,1203.97 h60
  text "Hole Length" at 1140.19,1103.99 h60
  text "= Routed Path Length + Tool Size = Slot length as defined in the PCB layout" at 1832.99,1103.99 h60

## Text inside footprints (layer, text, board x,y; h text height)
TF1: Bottom Overlay "k" at 500,787.52 h30 r90; Bottom Overlay "8" at 500,737.54 h30 r90; Bottom Overlay "7" at 500,693.54 h30 r90; Bottom Overlay "6" at 500,651.54 h30 r90; Bottom Overlay "5" at 500,609.54 h30 r90; Bottom Overlay "4" at 500,567.54 h30 r90; Bottom Overlay "3" at 500,520.54 h30 r90; Bottom Overlay "2" at 500,478.54 h30 r90; Bottom Overlay "1" at 500,435.54 h30 r90